# Altium PCB ASP_PCB_SMD.PcbDoc
Units mm, origin at the board's own origin, x right, y up, seen from the top; angles counter-clockwise.
Board outline 64.1 x 44.9 mm, 2 copper layers (Top Layer, Bottom Layer), stack 1.571 mm thick; 23 components, 19 nets, 83 pads, 9 vias.
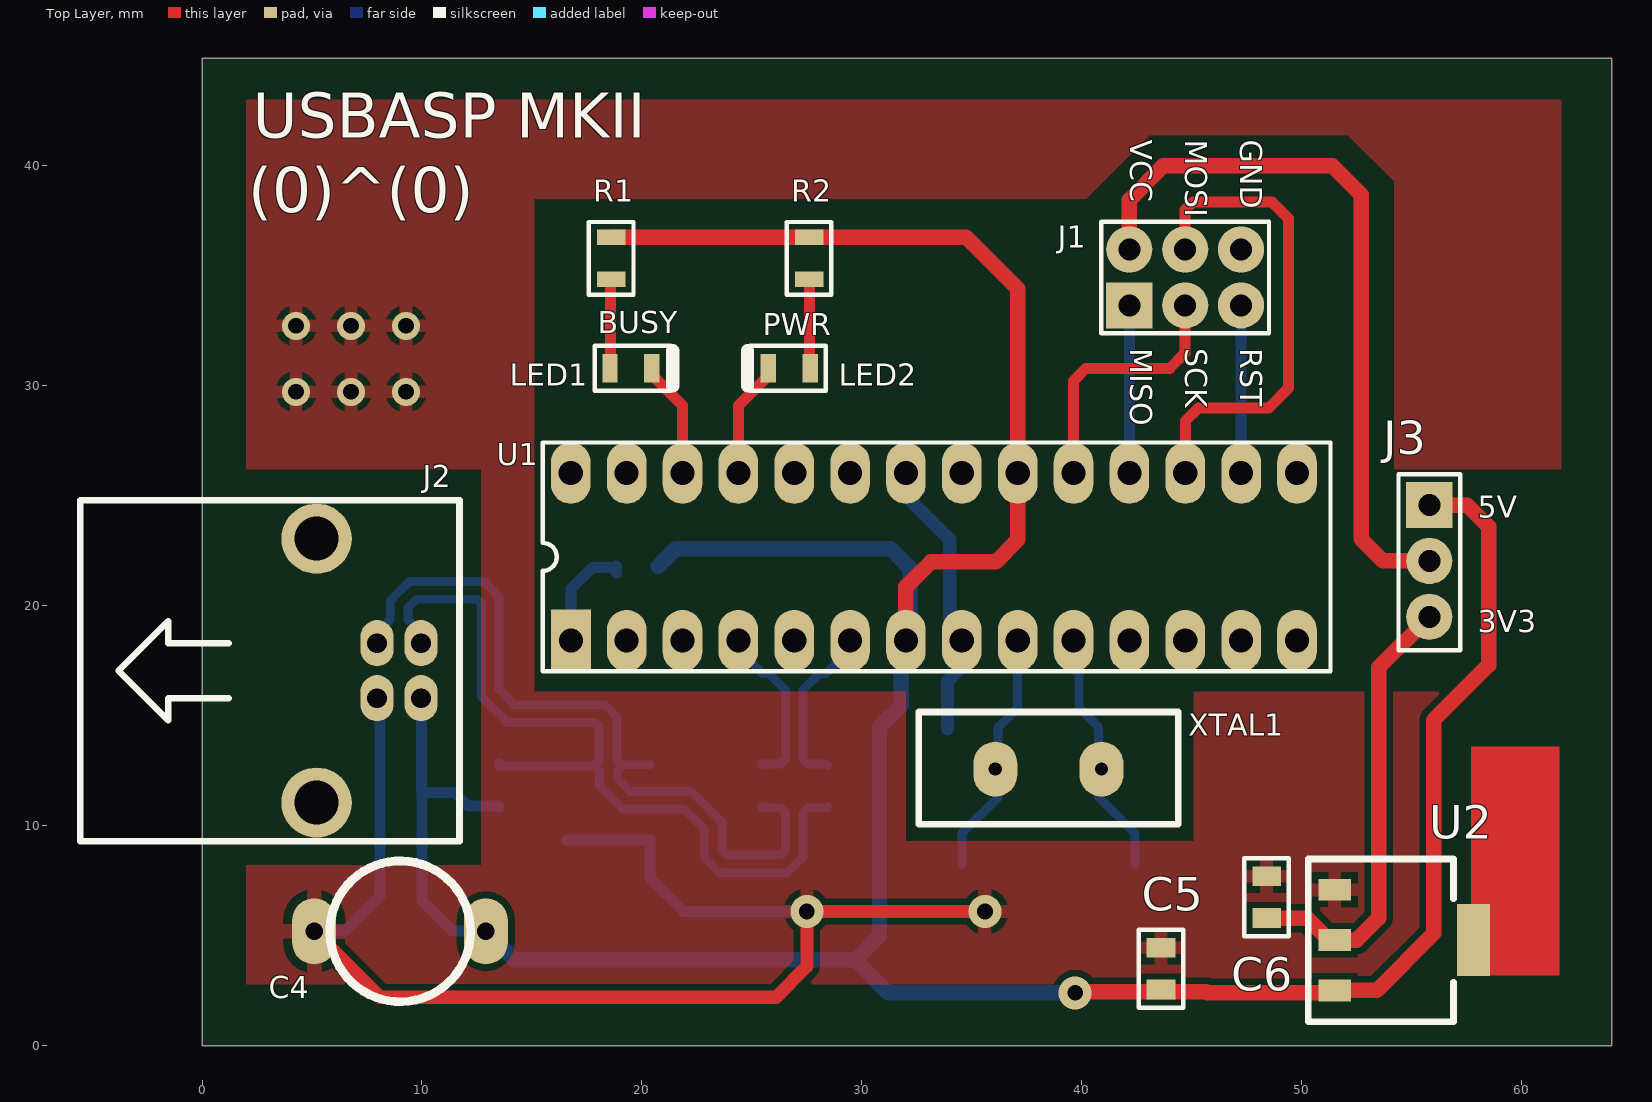
[diagram p0: Top Layer view]
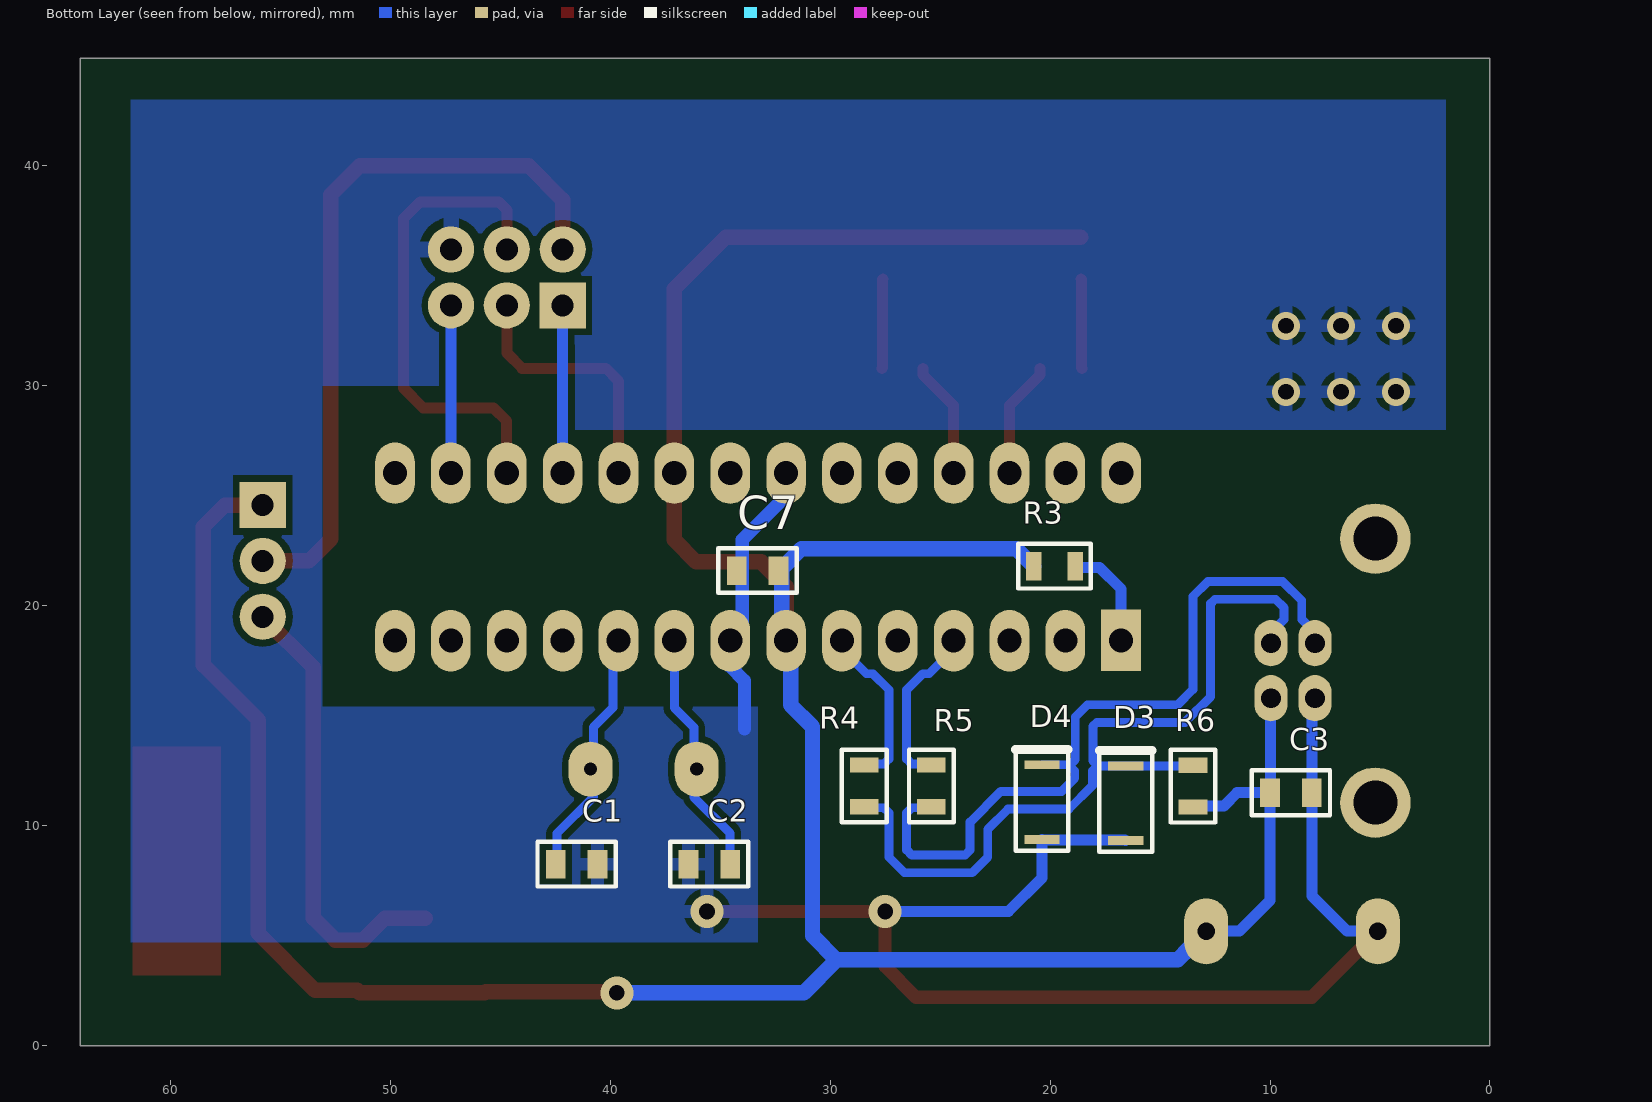
[diagram p1: Bottom Layer view, seen from below]
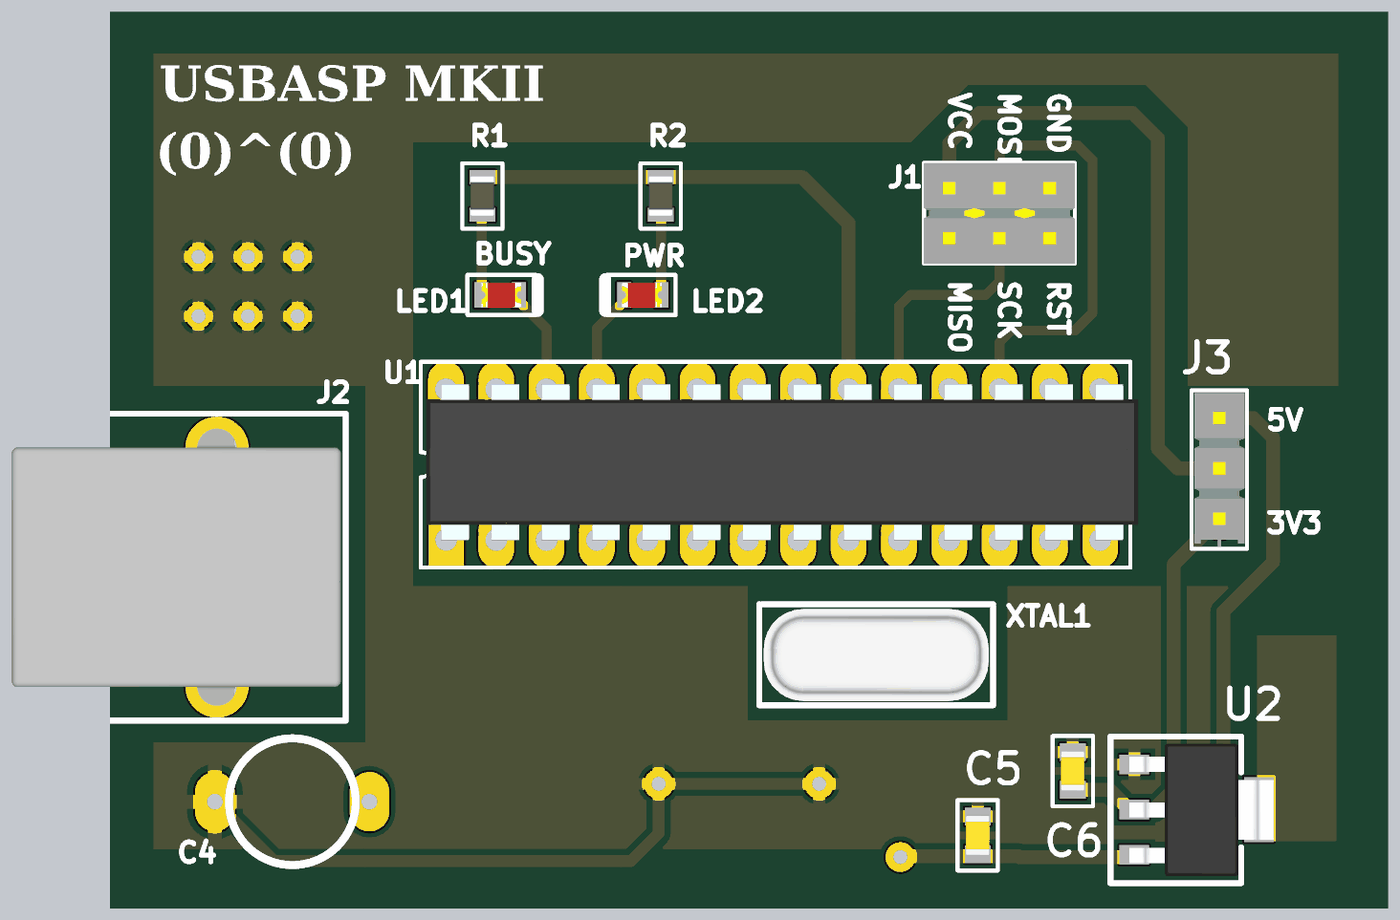
[diagram p2: 3D render of the assembled board from above, using the file's embedded part models]
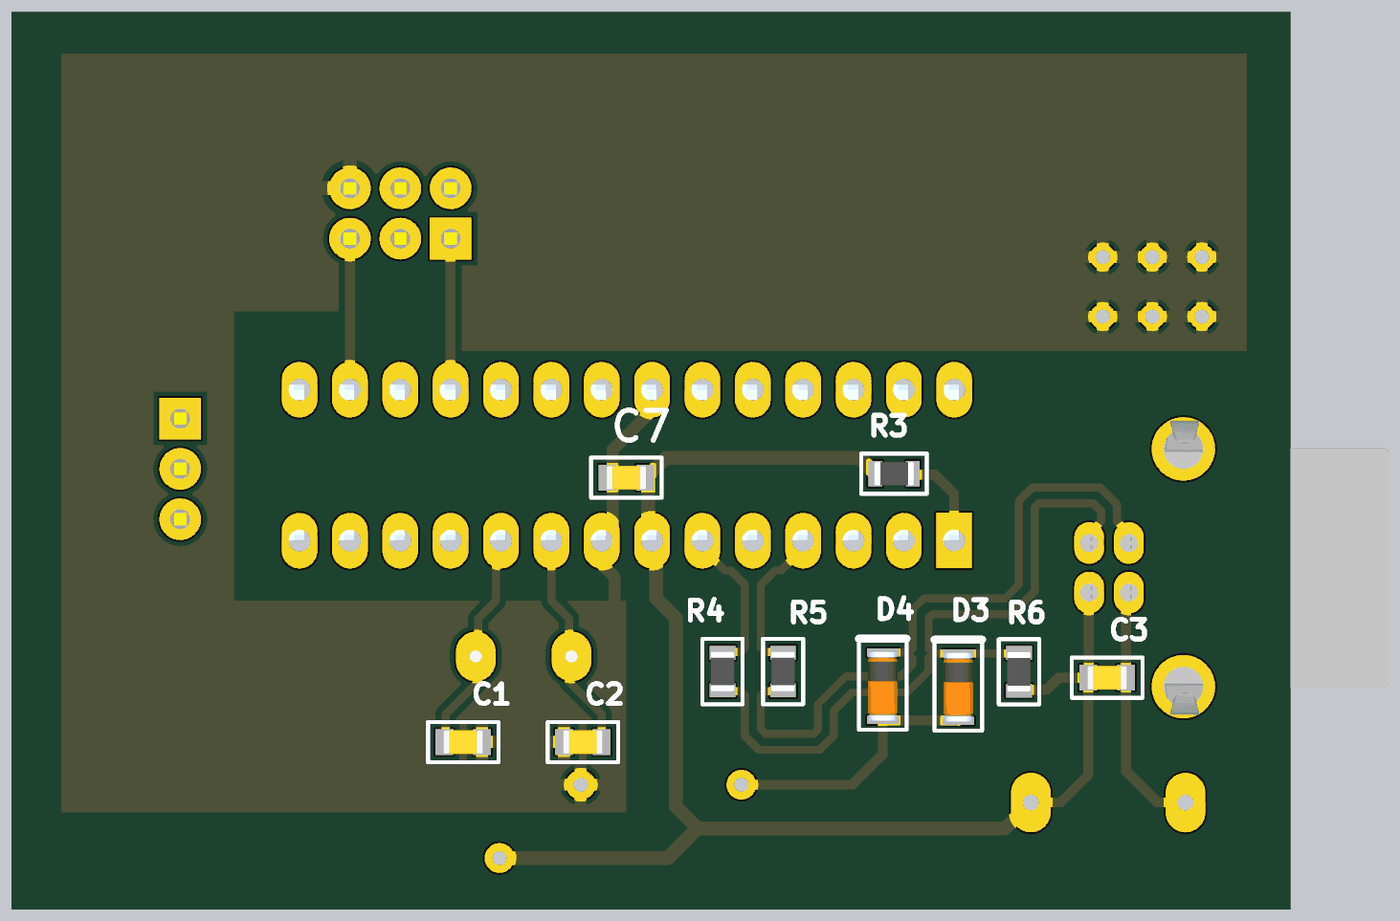
[diagram p3: 3D render of the assembled board from below, using the file's embedded part models]

## Layer stack, top to bottom
Top Solder: solder mask 0.0102, Solder Resist, Dk 3.5
Top Layer: signal copper 0.0356
Dielectric 1: dielectric 1.5, FR-4, Dk 4.8
Bottom Layer: signal copper 0.0356
Bottom Solder: solder mask 0.0102, Solder Resist, Dk 3.5

## Board outline
0,0 64.1,0 64.1,44.9 0,44.9

## Design rules (kind name [scope] priority, off if disabled: settings)
Clearance [All] p1: gap=0.3 ignorepadtopadclearanceinfootprint=FALSE except(0.4: Track-THPad Track-Via; 0.5: Track-Hole)
DiffPairsRouting [All] p1: maxlimit=0.5 minlimit=0.3 mostfreqgap=0.4 toplayer_minwidth=0.4 toplayer_maxwidth=0.6 toplayer_prefwidth=0.5 bottomlayer_minwidth=0.4 bottomlayer_maxwidth=0.6 bottomlayer_prefwidth=0.5 maxuncoupledlength=12.7
ParallelSegment [All] p1: limit=20 gap=0.4
PolygonConnect [All] p1: thpad.connectstyle=Relief thpad.reliefconductorwidth=0.7 thpad.reliefentries=4 thpad.polygonreliefangle="90 Angle" thpad.airgapwidth=0.4 smdpad.connectstyle=Relief smdpad.reliefconductorwidth=0.6 smdpad.reliefentries=4 smdpad.polygonreliefangle="90 Angle" smdpad.airgapwidth=0.3 via.connectstyle=Relief via.reliefconductorwidth=0.6 via.reliefentries=4 via.polygonreliefangle="90 Angle" via.airgapwidth=0.3
RoutingVias [All] p1: holewidth=0.9 width=1.5 viastyle="Through Hole" minholewidth=0.711 minwidth=1.27 maxholewidth=1 maxwidth=2
SolderMaskExpansion [All] p1: expansion=0.102 istentingtop=FALSE
Width [All] p1: maxlimit=2 minlimit=0.4 preferedwidth=0.6
29 further rules are at their usual default settings.

## Classes and differential pairs
component class ASP_SCH: C4 C5 C6 C7 J1 J2 J3 LED1 LED2 U1 U2 XTAL1
differential pair R_D: +R_D_P -R_D_N
differential pair D: +D_P -D_N

## Components (designator, comment, footprint, x,y, rotation, side; value= is the part's Value field where it differs from the comment)
C1 "0805_22p" "C0805 - 10uf" 41.529,8.255 r180 bottom
C2 "0805_22p" "C0805 - 10uf" 35.494,8.255 r180 bottom
C3 "0805_100n" "C0805 - 10uf" 9.05,11.5 r0 bottom
C4 "100u" CAPACITOR 9,5.2 r180 top
C5 "0805_100n" "C0805 - 10uf" 43.6,3.5 r270 top
C6 "0805_100n" "C0805 - 10uf" 48.4,6.75 r270 top
C7 "0805_100n" "C0805 - 10uf" 33.3,21.6 r180 bottom
D3 "LL-34 3V6" LL-34 16.559,11.022 r90 bottom
D4 "LL-34 3V6" LL-34 20.369,11.071 r90 bottom
J1 "HDR 2x3" "HDR 2x3 2.54mm_1" 42.16,33.66 r90 top
J2 "USB-B" USB_B 9.957,18.299 r270 top
J3 "HDR 1x3" "HDR 1x3 2.54mm" 55.8,24.58 r0 top
LED1 "0805_Red" 0805_LED 19.5,30.8 r0 top
LED2 "0805_Green" 0805_LED 26.7,30.8 r180 top
R1 "0805_1k2" R0805 18.6,35.8 r90 top
R2 "0805_1k2" R0805 27.6,35.8 r90 top
R3 "0805_R" R0805 19.8,21.8 r180 bottom
R4 "0805_68R" R0805 28.448,11.811 r90 bottom
R5 "0805_68R" R0805 25.4,11.811 r90 bottom
R6 "0805_1k2" R0805 13.5,11.8 r270 bottom
U1 "ATMEGA328P-PU" 28_DIP_7.62mm_1 16.764,18.415 r90 top
U2 "AMS1117" SOT-223 51.501,7.086 r270 top
XTAL1 "16 MHz Crystal" TH_CRYSTAL 38.481,12.573 r0 top

## Footprints (in the part's own frame and the unit in brackets; to place one, negate y for a bottom-side part, rotate by r counter-clockwise, add the part's x,y. Pads: shape width x height; smd on the part's side, far side on the other; paste and mask are expansions set on the pad)
28_DIP_7.62mm_1 [mm]
  rect 2.8x1.8 hole 1.1 unplated: 1(0.01,-0.01)
  oval 2.8x1.8 hole 1.1 unplated: 2(0,-2.54) 3(0,-5.08) 4(0,-7.62) 5(0,-10.16) 6(0,-12.7) 7(0,-15.24) 8(0,-17.78) 9(0,-20.32) 10(0,-22.86) 11(0,-25.4) 12(0,-27.94) 13(0,-30.48) 14(0,-33.02) 15(7.62,-33.02) 16(7.62,-30.48) 17(7.62,-27.94) 18(7.62,-25.4) 19(7.62,-22.86) 20(7.62,-20.32) 21(7.62,-17.78) 22(7.62,-15.24) 23(7.62,-12.7) 24(7.62,-10.16) 25(7.62,-7.62) 26(7.62,-5.08) 27(7.62,-2.54) 28(7.62,0)
  silkscreen extent -1.39,-34.54 9.01,1.27, body extent 0,-34.94 7.87,1, height 4.65
0805_LED [mm]
  rect 0.7x1.3 smd: 1(-0.95,0) 2(0.95,0)
  silkscreen extent -1.65,-1.02 1.9,1.02, body extent -0.95,-0.62 1.05,0.62, height 1.12
"C0805 - 10uf" [mm]
  rect 0.9x1.3 smd: 1(-0.95,0) 2(0.95,0)
  silkscreen extent -1.78,-1.02 1.78,1.02, body extent -1,-0.6 1,0.6, height 1.46
CAPACITOR [mm]
  oval 2x3 hole 0.8 unplated: 1(-3.9,0) 2(3.9,0)
  silkscreen extent -3.21,-3.2 3.18,3.2, body extent -3.2,-3.2 3.2,3.2, height 11
"HDR 1x3 2.54mm" [mm]
  rect 2.1x2.1 hole 1 unplated: 1(0,0)
  round 2.1 hole 1 unplated: 2(0,-2.54) 3(0,-5.08)
  silkscreen extent -1.4,-6.6 1.4,1.4, body extent -1.27,-6.48 1.27,1.27, height 8.39
"HDR 2x3 2.54mm_1" [mm]
  rect 2.1x2.1 hole 1 unplated: 1(0,0)
  round 2.1 hole 1 unplated: 2(2.54,0) 3(0,-2.54) 4(2.54,-2.54) 5(0,-5.08) 6(2.54,-5.08)
  silkscreen extent -1.27,-6.35 3.81,1.27, body extent -1.27,-6.35 3.81,1.27, height 8.39
LL-34 [mm]
  rect 0.4x1.6 smd: A(-1.7,0) K(1.7,0)
  silkscreen extent -2.2,-1.2 2.4,1.2, body extent -1.75,-0.75 1.75,0.75, height 1.45
R0805 [mm]
  rect 0.7x1.3 smd: 1(-0.95,0) 2(0.95,0)
  silkscreen extent -1.65,-1.02 1.65,1.02, body extent -1,-0.6 1,0.6, height 0.71
SOT-223 [mil]
  rect 39x59 smd: 1(180,0) 2(0,0) 3(90,0)
  rect 129x59 smd: 4(90,248)
  silkscreen extent -55,-47 236,213, body extent -41,-10 222,278, height 71
TH_CRYSTAL [mm]
  oval 2x2.5 hole 0.6 unplated: 1(-2.413,0) 2(2.413,0)
  silkscreen extent -5.9,-2.5 5.9,2.6, body extent -5.67,-2.29 5.68,2.36, height 5.5
USB_B [mm]
  oval 2.1x1.5 hole 0.9 unplated: D+(0,-2) D-(0,0) GND(2.5,-2) VBus(2.5,0)
  round 3.2 hole 2 unplated: S1(-4.75,-4.75) S2(7.25,-4.75)
  silkscreen extent -6.5,-15.5 9,1.75, body extent -6.2,-15.1 8.7,1.5, height 10.75

## Part data
C1 C2 C3: library part "SMD Capacitor", "TDK - C2012X5R1C106K085AC - SMD Multilayer Ceramic Capacitor, 10 µF, 16 V, 0805 [2012 Metric], ± 10%, X5R, C Series TDK"
C4: library part "Electrolytic Cap", "General Symbol For Electrolytic Caps", Capacitance=22uF, Case/Package=Radial, Dielectric Material=Aluminium, Manufacturer 1=Nichicon, Manufacturer Part Number 1=UVP1H220MPD1TD, Max Operating Temperature=85°C, Min Operating Temperature=-40°C, Package Quantity=1000, Ripple Current=89mA, Supplier Part Number 1=493-12700-1-ND, Tolerance=20%, Voltage Rating=50V, ComponentLink1Description=https://datasheet.ciiva.com/7781/e-vp-7781720.pdf?src-supplier=Element14, ComponentLink1URL=https://datasheet.ciiva.com/7781/e-vp-7781720.pdf?src-supplier=Element14, Diameter=8mm, Dissipation Factor=0.14%, Height=11.5mm, Height - Seated (Max)=0.512inch, Lead Pitch=3.5mm, Lead/Base Style=Straight, Length=11.5mm, Life (Hours)=2000Hour, Mount="Through Hole", Number of Pins=2, Packaging="Tape and Reel", Pricing 1="1=0.45000, 10=0.31100, 50=0.21780, 100=0.18660, 500=0.13998 (USD)", REACH SVHC="No SVHC", RoHS=Yes, Stock 1=3795, Supplier 1=Digi-Key, Termination=Radial, Voltage Rating (DC)=50V
C5 C6 C7: library part C2012X5R1C106K085AC, "TDK - C2012X5R1C106K085AC - SMD Multilayer Ceramic Capacitor, 10 µF, 16 V, 0805 [2012 Metric], ± 10%, X5R, C Series TDK", Capacitance=10uF, Case Code (Imperial)=0805, Case Code (Metric)=2012, Dielectric=X5R, Dielectric Material=Ceramic, Manufacturer 1=TDK, Max Operating Temperature=85°C, Min Operating Temperature=-55°C, Package Quantity=1, Supplier Part Number 1=445-7644-1-ND, Tolerance=10%, Voltage Rating=16V, Case/Package=0805, ComponentLink1Description=https://datasheet.ciiva.com/24218/c2012x5r1c106k085ac-264980-24218056.pdf?src-supplier=Mouser, ComponentLink1URL=https://datasheet.ciiva.com/24218/c2012x5r1c106k085ac-264980-24218056.pdf?src-supplier=Mouser, ComponentLink2Description=https://datasheet.ciiva.com/28451/1796654-28451610.pdf?src-supplier=Element14, ComponentLink2URL=https://datasheet.ciiva.com/28451/1796654-28451610.pdf?src-supplier=Element14, ComponentLink3Description=https://datasheet.ciiva.com/28602/1744655-28602170.pdf?src-supplier=Element14, ComponentLink3URL=https://datasheet.ciiva.com/28602/1744655-28602170.pdf?src-supplier=Element14, ComponentLink4Description=https://datasheet.ciiva.com/6259/tdkmlcccaprange-6259116.pdf?src-supplier=Digi-Key, ComponentLink4URL=https://datasheet.ciiva.com/6259/tdkmlcccaprange-6259116.pdf?src-supplier=Digi-Key, ComponentLink5Description=https://datasheet.ciiva.com/23803/1796654-23803020.pdf?src-supplier=Newark, ComponentLink5URL=https://datasheet.ciiva.com/23803/1796654-23803020.pdf?src-supplier=Newark, ComponentLink6Description=https://datasheet.ciiva.com/22719/1796654-22719549.pdf?src-supplier=Element14, ComponentLink6URL=https://datasheet.ciiva.com/22719/1796654-22719549.pdf?src-supplier=Element14, ComponentLink7Description=https://datasheet.ciiva.com/6259/tdkmlcccaprange-6259119.pdf?src-supplier=Digi-Key, ComponentLink7URL=https://datasheet.ciiva.com/6259/tdkmlcccaprange-6259119.pdf?src-supplier=Digi-Key, ComponentLink8Description=https://datasheet.ciiva.com/28673/mlcc-commercial-general-en-28673535.pdf?src-supplier=Element14, ComponentLink8URL=https://datasheet.ciiva.com/28673/mlcc-commercial-general-en-28673535.pdf?src-supplier=Element14, Depth=1.25mm, Height=0.85mm, Lead Free="Lead Free", Length=2mm, Manufacturer Part Number 1=C2012X5R1C106K085AC, Mount="Surface Mount", Number of Pins=2, Parameter Name="Tape and Reel", Pricing 1="1=0.24000, 10=0.16700, 50=0.11140, 100=0.09460, 500=0.06680, 1000=0.05844 (USD)", REACH SVHC="No SVHC", Resistor Type=Ceramic, RoHS=Yes, Stock 1=1313952, Supplier 1=Digi-Key, Termination=SMD/SMT, Thickness=0.037inch, Voltage Rating (DC)=16V, Weight=0.000194oz, Width=0.049inch
D3 D4: library part "Zener 5V1 LL-34"
J1: "CONN HEADER 6POS .100 STR 30AU", Color=Black, Current Rating=3A, Flammability Rating="UL94 V-0", Insulation Resistance=5GR, Manufacturer 1="Amphenol FCI", Manufacturer Part Number 1=67997-106HLF, Max Operating Temperature=125°C, Max Voltage Rating (AC)=1.5kV, Min Operating Temperature=-65°C, Package Quantity=100, Supplier Part Number 1=609-3393-ND, ComponentLink1Description=https://datasheet.ciiva.com/5153/67996-222463-5153820.pdf?src-supplier=Mouser, ComponentLink1URL=https://datasheet.ciiva.com/5153/67996-222463-5153820.pdf?src-supplier=Mouser, ComponentLink2Description=https://datasheet.ciiva.com/16726/67996-16726286.pdf?src-supplier=Avnet+Europe, ComponentLink2URL=https://datasheet.ciiva.com/16726/67996-16726286.pdf?src-supplier=Avnet+Europe, ComponentLink3Description=https://datasheet.ciiva.com/722/67996-722044.pdf?src-supplier=Digi-Key, ComponentLink3URL=https://datasheet.ciiva.com/722/67996-722044.pdf?src-supplier=Digi-Key, ComponentLink4Description=https://datasheet.ciiva.com/10149/67996-10149221.pdf?src-supplier=Avnet, ComponentLink4URL=https://datasheet.ciiva.com/10149/67996-10149221.pdf?src-supplier=Avnet, ComponentLink5Description=https://datasheet.ciiva.com/46393/1876884-46393067.pdf?src-supplier=Element14, ComponentLink5URL=https://datasheet.ciiva.com/46393/1876884-46393067.pdf?src-supplier=Element14, Connector Type="Male Pin", Contact Gender=Male, Contact Material=Bronze, Contact Mating Length=0.23inch, Contact Plating=Gold,GXT, Contact Post Length=3.05mm, Depth=4.83mm, Gender=Male, Housing Color=Black, Housing Material=Thermoplastic, Lead Free="Lead Free", Length=7.62mm, Mount="Through Hole", Number of Contacts=6, Number of Positions=6, Number of Rows=2, Orientation=Straight, Parameter Name 1=Bulk, Pitch=2.54mm, Pricing 1="1=1.78000, 10=1.61400, 100=1.38370, 500=1.15308, 1000=0.98835, 5000=0.87634, 10000=0.85657 (USD)", Radiation Hardening=No, REACH SVHC="No SVHC", RoHS=Yes, Row Spacing=0.1inch, Stock 1=1359, Supplier 1=Digi-Key, Termination="Through Hole", Voltage Rating=1.5kV
J2: library part "USB-Type B", "USB-Type B Female Connector"
J3: "1x3 Male Header 2.54 mm pitch"
LED1 LED2: library part 0805LED
R1 R2 R3 R4 R5 R6: library part "0805 Resistor"
U1: "ATMEGA328P-PU; 8 bit Microcontroller AVR 20MHz 1; 32kb Flash; 2kb RAM; I2C SPI 2", Case/Package=PDIP, Frequency=20MHz, Manufacturer 1="Microchip / Atmel", Max Operating Temperature=85°C, Max Supply Voltage=5.5V, Min Operating Temperature=-40°C, Min Supply Voltage=1.8V, Package Quantity=14, Supplier Part Number 1=ATMEGA328P-PU-ND, ComponentLink1Description=https://datasheet.ciiva.com/1157/1684409-1157696.pdf?src-supplier=Element14, ComponentLink1URL=https://datasheet.ciiva.com/1157/1684409-1157696.pdf?src-supplier=Element14, ComponentLink2Description=https://datasheet.ciiva.com/20168/73-4283-20168380.pdf?src-supplier=Rapid+Electronics, ComponentLink2URL=https://datasheet.ciiva.com/20168/73-4283-20168380.pdf?src-supplier=Rapid+Electronics, ComponentLink3Description=https://datasheet.ciiva.com/19457/2139111-19457070.pdf?src-supplier=Jameco, ComponentLink3URL=https://datasheet.ciiva.com/19457/2139111-19457070.pdf?src-supplier=Jameco, ComponentLink4Description=https://datasheet.ciiva.com/26818/atmega328p-pu-26818578.pdf?src-supplier=IIIC, ComponentLink4URL=https://datasheet.ciiva.com/26818/atmega328p-pu-26818578.pdf?src-supplier=IIIC, ComponentLink5Description=https://datasheet.ciiva.com/29119/155197-da-01-en-microcontr-atmega328p-pu-8bit-pdip-28-29119593.pdf?src-supplier=Conrad, ComponentLink5URL=https://datasheet.ciiva.com/29119/155197-da-01-en-microcontr-atmega328p-pu-8bit-pdip-28-29119593.pdf?src-supplier=Conrad, ComponentLink6Description=https://datasheet.ciiva.com/15213/getdatasheetpartid-318533-15213133.pdf?src-supplier=Verical, ComponentLink6URL=https://datasheet.ciiva.com/15213/getdatasheetpartid-318533-15213133.pdf?src-supplier=Verical, Contact Plating=Tin,Matte, Core Architecture=AVR, Data Bus Width=8b, Height=3.28mm, Interface=I2C,SPI,UART,USART,2-Wire, Lead Free="Lead Free", Length=37.4mm, Manufacturer Part Number 1=ATMEGA328P-PU, Max Frequency=20MHz, Memory Size=32KB, Memory Type=FLASH, Mount="Through Hole", Number of ADC Channels=6, Number of I2C Channels=1, Number of I/Os=23, Number of Pins=28, Number of Programmable I/O=23, Number of PWM Channels=6, Number of SPI Channels=1, Number of Timers/Counters=3, Oscillator Type=Internal, Packaging=Rail/Tube, Peripherals="Brown-out Detect/Reset,POR,PWM,WDT", Pricing 1="1=2.08000, 25=1.91000, 100=1.73000 (USD)", Radiation Hardening=No, RAM Size=2KB, REACH SVHC="No SVHC", RoHS=Yes, Stock 1=7484, Supplier 1=Digi-Key, Watchdog Timer=Yes, Width=6.76mm
U2: library part "AMS1117 - 3V3", "AMS1117-3.3 Checked Fixed Positive LDO Regulator, 3.3V, 1.3V Dropout, PDSO3 Voltage Regulators - Linear"
XTAL1: library part Crystal

## Via types
v1: diameter 1.27, hole 0.711, Top Layer to Bottom Layer, 6 vias
v2: diameter 1.5, hole 0.711, Top Layer to Bottom Layer, 3 vias

## Nets (pads, with @x,y where several pads share a name; then routed paths per layer and width w, separated by ;. In a path a pad name is that pad's centre, name@x,y a point inside that pad or via, vN(x,y) a via of type N, cw(c..) or ccw(c..) an arc to the next point about the centre after c; other vN are vias at no path point)
3V3: C6.2 J3.3 U2.3 | length 20.6
  Top Layer w0.7: C6.2 50.247,5.8 51.247,4.8 U2.3 52.5,4.8 53.5,5.8 53.5,17.2 J3.3
"5V / 3V3": J1.2 J3.2 | length 33.2
  Top Layer w0.7: J1.2 42.16,38.46 43.7,40 51.4,40 52.7,38.7 52.7,23.04 53.7,22.04 J3.2
D_N: R4.2 U1.6 | length 7.7
  Bottom Layer w0.4: R4.2 28.406,12.803 27.558,12.803 27.324,13.037 27.324,16.181 28.057,16.914 28.344,16.914 29.464,18.034 U1.6
D_P: R5.2 U1.4 | length 7.7
  Bottom Layer w0.4: U1.4 24.384,18.034 25.504,16.914 25.791,16.914 26.524,16.181 26.524,13.037 26.29,12.803 25.442,12.803 R5.2
GND: C1.2 C2.1 C3.1 C4.2 C5.1 C6.1 C7.1 D3.A D4.A J1.6 J2.GND U1.8 U1.22 U2.2 | length 74.4
  Top Layer w0.6: C4.2 5.1,5.106 5.793,4.413 5.887,4.413 8.1,2.2 26.1,2.2 27.5,3.6 v2(27.5,6.1) v2(35.6,6.1) v2@35.771,6.1
  Bottom Layer w0.5: C4.2@4.736,5.207 6.507,5.207 8.1,6.8 C3.1 8.1,15.656 J2.GND ; D3.A 16.583,9.347 20.345,9.347 D4.A 20.369,7.631 21.9,6.1 v2(27.5,6.1)
  Bottom Layer w0.6: U1.22 32.004,24.996 34,23 34,21.6 34,18.959 U1.8 34.544,17.244 33.9,16.6 33.9,14.4
  other v1: 4.273,29.727 6.773,29.727 9.273,29.727 4.273,32.727 6.773,32.727 9.273,32.727
MISO: J1.1 U1.18 | length 7.6
  Bottom Layer w0.5: J1.1 42.164,33.656 U1.18
MOSI: J1.4 U1.17 | length 22.3
  Top Layer w0.5: J1.4 44.7,38 45.05,38.35 48.65,38.35 49.4,37.6 49.4,29.9 48.5,29 45.3,29 44.704,28.404 U1.17
NetLED1_1: LED1.1 R1.1 | length 4.1
  Top Layer w0.5: LED1.1 18.575,30.825 18.575,34.825 R1.1
NetLED1_2: LED1.2 U1.26 | length 5.3
  Top Layer w0.5: LED1.2 20.45,30.5 21.844,29.106 U1.26
NetLED2_1: LED2.1 R2.1 | length 4.1
  Top Layer w0.5: R2.1 27.625,34.825 27.625,30.825 LED2.1
NetLED2_2: LED2.2 U1.25 | length 5.3
  Top Layer w0.5: U1.25 24.384,29.106 25.778,30.5 LED2.2@25.778,30.8
NetR3_2: R3.2 U1.1 | length 6.1
  Bottom Layer w0.5: U1.1@16.124,19.075 U1.1 16.774,20.774 17.75,21.75 18.8,21.75 R3.2 R3.2@18.85,21.5
R_D_N: D3.K J2.D- R4.1 R6.1 | length 38.2
  Bottom Layer w0.4: J2.D- 9.957,18.783 9.357,19.383 9.357,19.908 9.749,20.3 12.5,20.3 12.7,20.1 12.7,15.869 13.869,14.7 17.869,14.7 18.054,14.515 18.054,12.956 17.82,12.722 ; R6.1 13.528,12.722 R6.1@13.628,12.722 ; R6.1@13.5,12.85 R6.1@13.628,12.722 ; R4.1 28.406,10.819 27.558,10.819 27.324,10.585 27.324,8.569 26.621,7.866 23.537,7.866 22.834,8.569 22.834,9.834 21.908,10.761 19.138,10.761 18.074,11.825 18.074,12.488 17.84,12.722 17.82,12.722 ; R6.1@13.628,12.722 D3.K 17.82,12.722
R_D_P: D4.K J2.D+ R5.1 | length 35
  Bottom Layer w0.4: J2.D+ 7.957,18.783 8.557,19.383 8.557,20.24 9.417,21.1 12.831,21.1 13.5,20.431 13.5,16.2 14.2,15.5 18.3,15.5 18.854,14.946 18.854,13.005 19.088,12.771 19.157,12.771 ; D4.K 19.157,12.771 ; R5.1 25.442,10.819 26.29,10.819 26.524,10.585 26.524,8.9 26.29,8.666 23.869,8.666 23.634,8.9 23.634,10.166 22.239,11.561 19.469,11.561 18.874,12.156 18.874,12.488 19.157,12.771
RST: J1.5 U1.16 | length 7.6
  Bottom Layer w0.5: J1.5 47.242,33.658 47.242,26.037 U1.16
SCK: J1.3 U1.19 | length 12
  Top Layer w0.5: U1.19 39.624,30.224 40.2,30.8 44,30.8 44.7,31.5 J1.3
VCC: C3.2 C4.1 C5.2 C7.2 J2.VBus J3.1 R1.2 R2.2 R3.1 R6.2 U1.7 U1.20 U2.1 | length 156.4
  Top Layer w0.7: R1.2 R2.2 34.75,36.75 37.084,34.416 U1.20 37.084,22.994 36.09,22 33.139,22 32.004,20.865 U1.7 ; v2(39.7,2.4) 39.75,2.45 45.65,2.45 45.7,2.4 51.387,2.4 U2.1 53.414,2.514 56,5.1 56,14.8 58.5,17.3 58.5,23.6 57.52,24.58 56.5,24.58 56.38,24.46 56.38,24 J3.1
  Bottom Layer w0.5: J2.VBus 9.979,15.777 9.979,11.521 C3.2 ; C4.1@12.536,5.207 11.393,5.207 10,6.6 C3.2 ; R6.2 13.45,10.9 12.1,10.9 11.5,11.5 C3.2
  Bottom Layer w0.7: C4.1 12.9,5.052 13.501,4.451 13.649,4.451 14.2,3.9 29.7,3.9 ; R3.1 21.55,22.6 31.3,22.6 32.2,21.7 32.2,18.611 U1.7 ; v2(39.7,2.4) 31.2,2.4 29.7,3.9 ; 29.7,3.9 30.8,5 30.8,14.5 31.794,15.494 U1.7@31.794,17.407 ; U1.7@31.794,17.407 31.794,18.205 U1.7 ; U1.7@31.794,17.407 32.004,17.617 U1.7
XT1: C1.1 U1.10 XTAL1.2 | length 11.2
  Bottom Layer w0.406: U1.10@39.878,18.415 39.878,15.367 40.767,14.478 40.767,12.573 40.767,11.303 42.418,9.652 C1.1@42.418,8.255
XT2: C2.2 U1.9 XTAL1.1 | length 11.2
  Bottom Layer w0.406: C2.2 34.544,9.652 36.195,11.303 36.195,12.573 36.195,14.478 37.084,15.367 U1.9
pads on no net: J2.S1 J2.S2 U1.2 U1.3 U1.5 U1.11 U1.12 U1.13 U1.14 U1.15 U1.21 U1.23 U1.24 U1.27 U1.28 U2.4

## Polygon pours and split planes (outlines as drawn)
GND on Top Layer "Top Layer-GND" (solid, remove dead copper, pour order 20): 2,2.8 57.7,2.8 57.7,16.1 15.1,16.1 15.1,28 15.1,38.5 37.9,38.5 40.2,38.5 43.1,41.4 52.1,41.4 54.2,39.3 54.2,26.2 61.8,26.2 61.8,43 2,43 2,26.2 12.7,26.2 12.7,8.2 2,8.2
GND on Bottom Layer "GND" (solid, remove dead copper, pour order 16): 33.3,4.7 61.8,4.7 61.8,43 47.8,43 47.8,30 53.1,30 53.1,15.4 33.3,15.4
GND on Bottom Layer "GND" (solid, remove dead copper, pour order 10): 2,43 2,28 41.6,28 41.6,31.9 51.8,31.9 51.8,43

## Other copper
Top Layer:
  pour cut-out: 32,9.3 45.1,9.3 45.1,16.1 32,16.1
  region: 57.7,13.6 57.7,3.2 61.7,3.2 61.7,13.6

## Silkscreen, mask and mechanical layers (free items; w line width, h text height)
Top Overlay:
  text "VCC" at 42.2,41.2 h1 r270
  text "MOSI" at 44.7,41.2 h1 r270
  text "GND" at 47.2,41.2 h1 r270
  text "USBASP MKII" at 2.3,40.6 h3.5
  text "(0)^(0)" at 2.1,37.2 h3.5
  text "BUSY" at 18,32.4 h1
  text "PWR" at 25.5,32.3 h1
  text "MISO" at 42.2,31.7 h1 r270
  text "SCK" at 44.7,31.7 h1 r270
  text "RST" at 47.2,31.7 h1 r270
  text "5V" at 58,24 h1
  text "3V3" at 58,18.8 h1
Board:
  the board outline again, w0.4